# EAGLE board nanoHC06Rx (EAGLE 9.6.1)
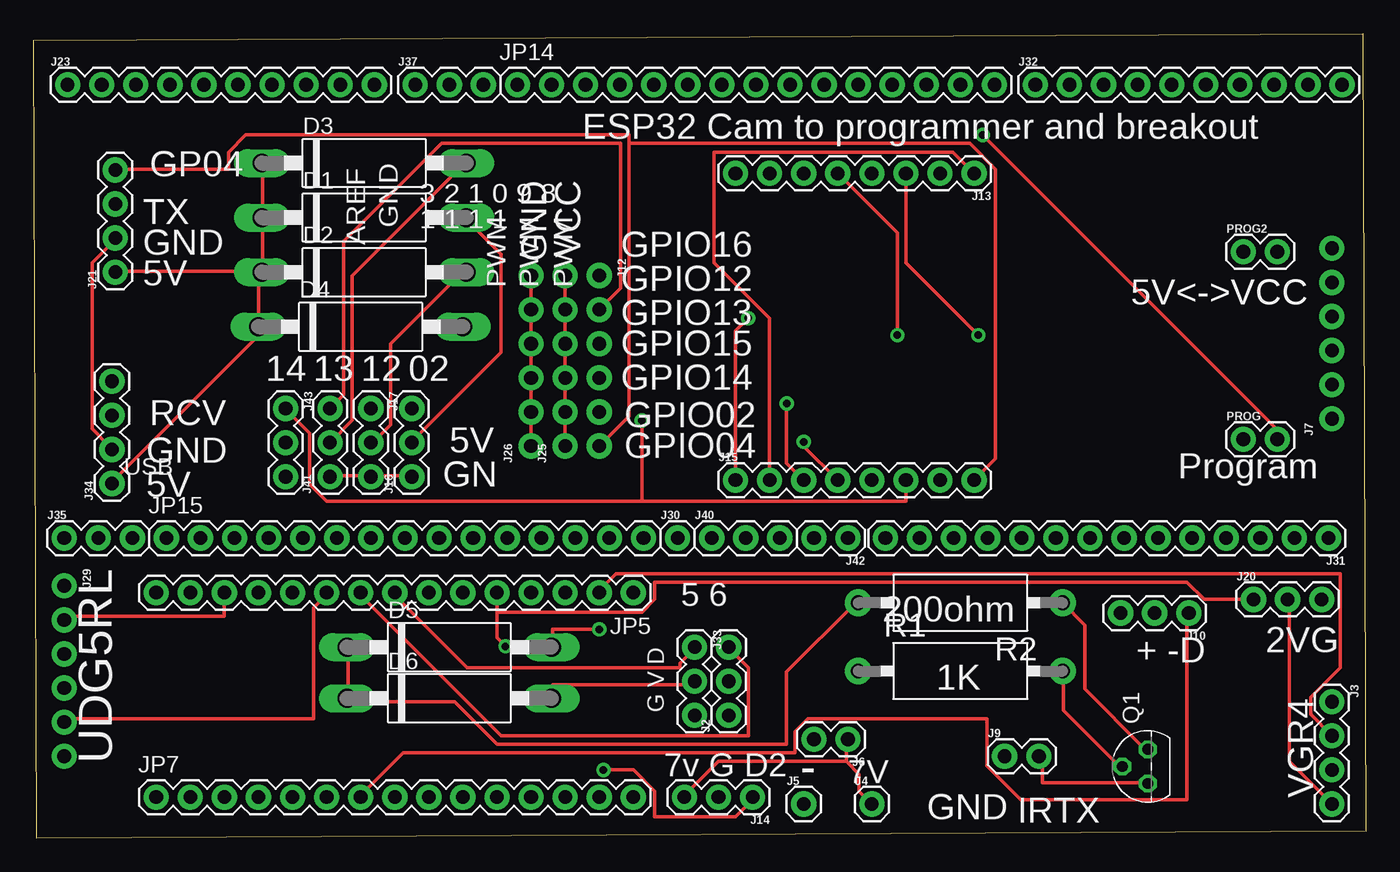
[diagram p0: board, top side]
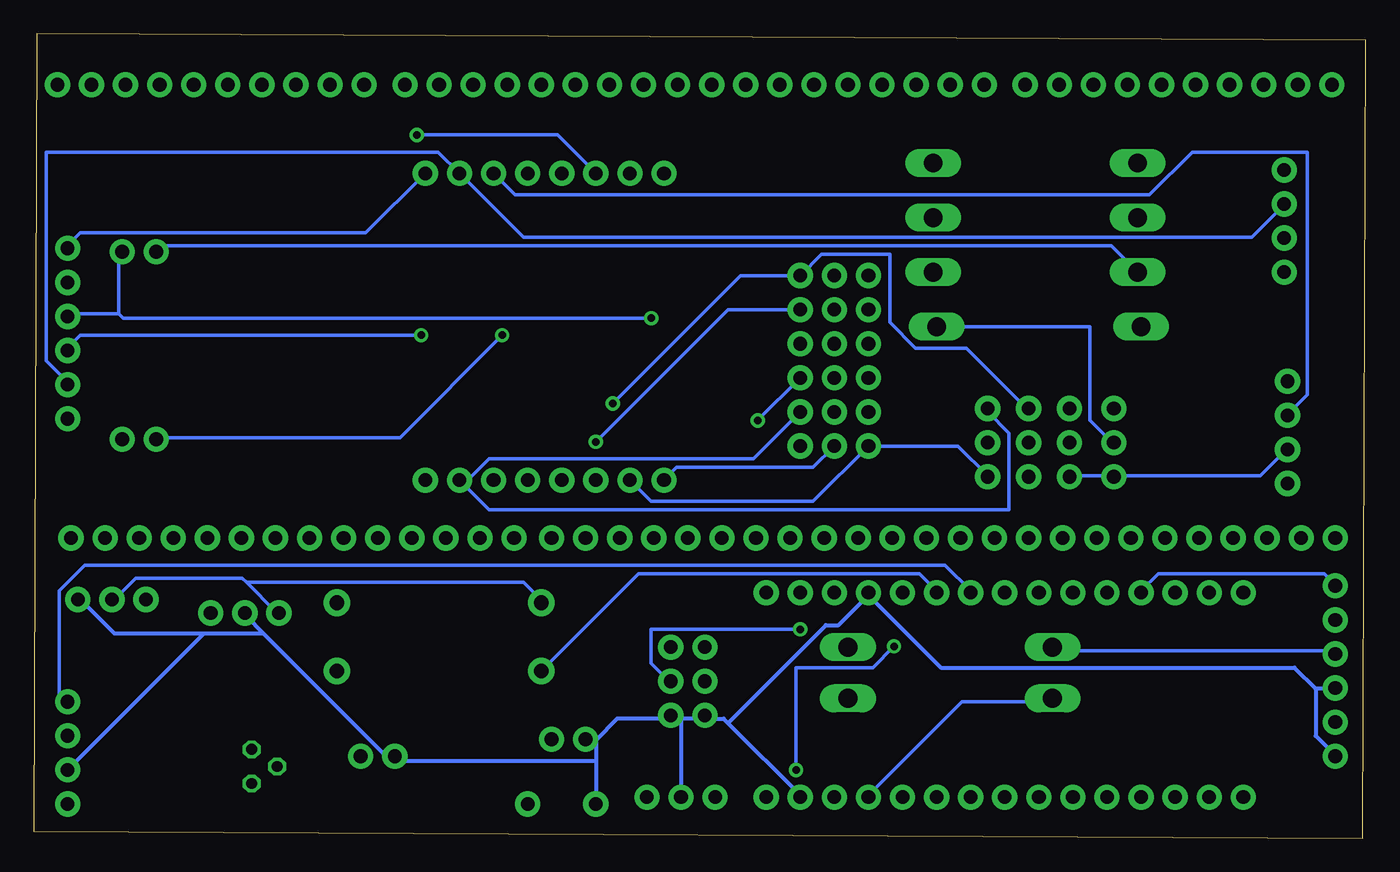
[diagram p1: board, bottom side, seen from below]

Size 99.31 x 59.94 mm. Coordinates in mm from the lower left corner, seen from the top.
Outline: 0,59.44 99.06,59.94 99.31,0.51 0.25,0 0,59.44
Copper layers (1*16): Top 0.035mm / dielectric 1.5mm / Bottom 0.035mm
Design rules "default": minimum track width 10mil, minimum drill 22mil, track to track 10mil, track to pad 10mil, pad to pad 10mil, via to via 16mil, smd to smd 8mil, copper to edge 30mil, drill to drill 12mil, minimum pad ring 10mil, minimum via ring 10mil, stop-mask expansion 4mil, vias tented up to drill 0mil, thermal gap 10mil
Net classes: 0 default: width 0.254 mm, clearance 0.254 mm; 1 power: width 0.61 mm, drill 0.711 mm, clearance 0.33 mm; 2 gnd: width 0.305 mm, drill 0.711 mm, clearance 0.254 mm; 3 usbvcc: width 0.508 mm, drill 0.711 mm, clearance 0.254 mm; 4 aref: width 0.406 mm
vRestrict: area 25.7,45.5 to 27.3,49.1; area 33.7,41 to 35.2,44.6; area 36.2,41 to 37.7,44.6; area 38.7,41 to 40.3,44.6; area 42.8,38.6 to 43.3,38.9

## Footprints (pad centres in the part's own frame; a part is rotated, then mirrored left to right if it is on the bottom)
C1702-15 = drill 1.397 long: A 7.62,0; C -7.62,0
1X03 = drill 1.016 pad 1.88: 1 0,0; 2 2.54,0; 3 5.08,0
1X04 = drill 1.016 pad 1.88: 1 0,0; 2 2.54,0; 3 5.08,0; 4 7.62,0
1X01 = drill 1.016 pad 1.88: 1 0,0
1X02 = drill 1.016 pad 1.88: 1 0,0; 2 2.54,0
1X06_NO_SILK = drill 1.016 pad 1.88: 1 0,0; 2 2.54,0; 3 5.08,0; 4 7.62,0; 5 10.16,0; 6 12.7,0
1X08 = drill 1.016 pad 1.88: 1 0,0; 2 2.54,0; 3 5.08,0; 4 7.62,0; 5 10.16,0; 6 12.7,0; 7 15.24,0; 8 17.78,0
1X10 = drill 1.016 pad 1.88: 1 0,0; 2 2.54,0; 3 5.08,0; 4 7.62,0; 5 10.16,0; 6 12.7,0; 7 15.24,0; 8 17.78,0; 9 20.32,0; 10 22.86,0
1X14 = drill 1.016 pad 1.88: 1 0,0; 2 2.54,0; 3 5.08,0; 4 7.62,0; 5 10.16,0; 6 12.7,0; 7 15.24,0; 8 17.78,0; 9 20.32,0; 10 22.86,0; 11 25.4,0; 12 27.94,0; 13 30.48,0; 14 33.02,0
1X15@1 = drill 1.016 pad 1.88: 1 0,0; 2 2.54,0; 3 5.08,0; 4 7.62,0; 5 10.16,0; 6 12.7,0; 7 15.24,0; 8 17.78,0; 9 20.32,0; 10 22.86,0; 11 25.4,0; 12 27.94,0; 13 30.48,0; 14 33.02,0; 15 35.56,0
TO92 = drill 0.813 octagon: 1 1.27,0; 2 0,1.905; 3 -1.27,0
CA0001 = drill 1.1 pad 2: 1 -7.62,0; 2 7.62,0

## Placement (x,y rotation side)
D1  1N5333  [C1702-15]  24.64,46.23 0 top
D2  1N5333  [C1702-15]  24.64,42.16 0 top
D3  1N5333  [C1702-15]  24.64,50.29 0 top
D4  1N5333  [C1702-15]  24.38,38.1 0 top
D5  1N5333  [C1702-15]  30.99,14.22 0 top
D6  1N5333  [C1702-15]  30.99,10.41 0 top
J2  Relay  [1X03]  51.82,9.14 90 top
J3  [1X04]  96.77,10.16 270 top
J4  [1X01]  62.48,2.54 0 top
J5  [1X01]  57.4,2.54 0 top
J6  [1X02]  60.71,7.37 180 top
J7  [1X06_NO_SILK]  96.77,31.24 90 top
J9  [1X02]  72.39,6.1 0 top
J10  Relay  [1X03]  86.11,16.76 180 top
J12  [1X06_NO_SILK]  42.16,41.91 270 top
J13  [1X08]  70.1,49.53 180 top
J14  Relay  [1X03]  53.59,3.05 180 top
J15  [1X08]  52.32,26.67 0 top
J16  Relay  [1X03]  28.19,26.92 90 top
J17  Relay  [1X03]  25.15,32 270 top
J20  Relay  [1X03]  90.93,17.78 0 top
J21  [1X04]  6.1,42.16 90 top
J23  [1X10]  2.54,56.13 0 top
J25  [1X06_NO_SILK]  39.62,29.21 90 top
J26  [1X06_NO_SILK]  37.08,29.21 90 top
J29  [1X06_NO_SILK]  2.29,18.8 270 top
J30  [1X01]  48.01,22.35 0 top
J31  [1X14]  96.52,22.35 180 top
J32  [1X10]  74.68,56.13 0 top
J33  Relay  [1X03]  49.28,14.22 270 top
J34  [1X04]  5.84,26.42 90 top
J35  [1X03]  2.29,22.35 0 top
J37  [1X03]  28.45,56.13 0 top
J40  [1X03]  50.55,22.35 0 top
J41  Relay  [1X03]  22.1,26.92 90 top
J42  [1X02]  60.71,22.35 180 top
J43  Relay  [1X03]  18.8,32 270 top
JP5  [1X15@1]  44.7,18.29 180 top
JP7  [1X15@1]  9.14,3.05 0 top
JP14  [1X15@1]  36.07,56.13 0 top
JP15  [1X15@1]  9.91,22.35 0 top
PROG  [1X02]  90.17,29.72 0 top
PROG2  [1X02]  90.17,43.69 0 top
Q1  2N5088  [TO92]  83.06,5.33 90 top
R1  1K  [CA0001]  69.09,12.45 0 top
R2  1K  [CA0001]  69.09,17.53 180 top

## Library data of the parts
D1-D6 = diode
J2 J10 J14 J16 J17 J20 J33 J41 J43 = SparkFun-Connectors; PROD_ID: XXX-00000
J3 J21 J34 = SparkFun-Connectors; PROD_ID: CONN-09696
J4-J6 J9 J30 J31 J35 J37 J40 J42 JP5 JP7 JP14 JP15 PROG PROG2 = SparkFun-Connectors
J7 J12 J25 J26 J29 = SparkFun-Connectors; PROD_ID: CONN-08437
J13 J15 = SparkFun-Connectors; PROD_ID: CONN-08438
J23 J32 = SparkFun-Connectors; PROD_ID: CONN-11563
Q1 = transistor-npn
R1 R2 = resistor-power; OC_FARNELL: unknown; OC_NEWARK: unknown

## Nets
3.3V_B: J13.8
5V_B: D1.C D2.C D3.C D4.C J21.1 J34.1 PROG2.1
7.4V: J4.1 J6.1 J14.3
D0: J3.2 JP5.2
D1: JP5.1
D2: J14.1 J20.1 JP5.5
D3: JP5.6 R1.1
D4: J3.1 JP5.7
D5: J33.1 JP5.8
D6: J2.3 JP5.9
D7: J29.5 JP5.10
D8: JP5.11
D9: J29.1 JP5.12
D10: J29.2 JP5.13
D11: JP5.14
D12: JP5.15
D13: JP7.1
D14: JP7.4
D15: JP7.5
D16: JP7.6
D17: J10.1 JP7.7
D18: JP7.8
D19: JP7.9
D20: JP7.10
D21: JP7.11
GND [gnd]: J2.1 J3.3 J5.1 J6.2 J9.1 J10.2 J14.2 J20.3 J29.4 J29.6 J33.3 JP5.4 JP7.14
GND_B: J7.6 J13.1 J15.2 J16.1 J17.3 J21.2 J26.1 J26.2 J26.3 J26.4 J26.5 J26.6 J34.2 J41.1 J43.3
GPIO02_B: J12.5 J15.7 J16.3
GPIO04_B: J12.6 J15.8 J21.4
GPIO12_B: J12.1 J15.3 J17.1
GPIO13_B: J12.2 J15.4 J41.3
GPIO14_B: J12.4 J15.6 J43.1
GPIO15_B: J15.5
GPIO16_B: J13.7
IRTX: J9.2 Q1.3
N$1: Q1.2 R1.2
N$2: D1.A J16.2
N$3: Q1.1 R2.1
N$4: D2.A J17.2
N$5: D3.A J41.2
N$6: D4.A J43.2
N$7: D5.A J2.2
N$8: D6.A J33.2
PROG1: J13.5 PROG.1
PROG2: J13.6 PROG.2
UOR: J7.3 J13.3 J34.3
UOT: J7.2 J13.2 J21.3
VCC: D5.C D6.C J3.4 J10.3 J20.2 J29.3 JP7.12 R2.2
VCC_B: J7.4 J15.1 J25.1 J25.2 J25.3 J25.4 J25.5 J25.6 PROG2.2

## Tracks (layer width: path | path; a pad name or v marks a point on that pad's centre or on a via)
5V_B
  Top 0.254: J34.1 5.97,26.67 16.76,37.47 D4.C 16.76,41.91 D2.C | D3.C 17.08,50.16 17.08,46.35 D1.C 17.08,46.04 17.08,42.23 D2.C | J21.1 6.29,42.23 16.76,42.23 D2.C
  Bottom 0.254: D2.C 18.99,44.13 89.79,44.13 90.11,43.81 PROG2.1
7.4V
  Top 0.254: 60.58,5.71 51.05,5.71 48.51,3.17 J14.3 | 60.58,5.71 60.58,7.3 J6.1 | J4.1 61.53,3.49 61.53,4.76 60.58,5.71
D0
  Top 0.254: J3.2 95.19,9.21 95.19,10.48 97.41,12.7 97.41,19.68 43.43,19.68 42.16,18.41 JP5.2
D2  (via drill 0.56)
  Top 0.254: v42.48,5.08 44.7,5.08 46.29,3.49 46.29,1.59 52.32,1.59 53.59,2.86 J14.1 | v35.18,14.29 34.54,14.92 34.54,16.83 | JP5.5 34.54,16.83 | J20.1 87.25,17.78 85.98,19.05 46.29,19.05 46.29,17.78 45.34,16.83 34.54,16.83
  Bottom 0.254: v42.48,5.08 42.48,12.7 36.77,12.7 v35.18,14.29
D3
  Bottom 0.254: R1.1 54.23,19.68 33.27,19.68 32,18.41 JP5.6
D4
  Bottom 0.254: J3.1 97.41,10.16 97.41,18.41 95.5,20.32 31.37,20.32 29.46,18.41 JP5.7
D5
  Top 0.254: JP5.8 26.92,18.1 32.32,12.7 48.2,12.7 48.2,13.02 49.15,13.97 J33.1
D6
  Top 0.254: JP5.9 24.38,18.1 34.86,7.62 53.28,7.62 53.28,12.7 52.01,13.97 J2.3
D7
  Top 0.254: J29.5 2.48,8.89 20.89,8.89 20.89,17.14 21.84,18.1 JP5.10
D9
  Bottom 0.254: J29.1 2.48,19.05 3.11,19.68 15.49,19.68 16.76,18.41 JP5.12
D10
  Top 0.254: JP5.13 14.22,16.51 2.48,16.51 J29.2
D17
  Top 0.254: JP7.7 24.38,3.17 27.56,6.35 56.77,6.35 56.77,7.94 57.72,8.89 71.06,8.89 71.06,5.4 73.6,2.86 85.98,2.86 85.98,16.51 J10.1
GND
  Bottom 0.305: 57.4,7.3 57.4,5.71 | 57.4,5.71 J5.1 | 57.4,7.3 58.04,7.3 J6.2 57.4,7.3 | 57.4,5.71 72.01,5.71 J9.1 72.64,6.35 73.28,6.35 82.17,15.24 | 82.17,15.24 83.44,16.51 J10.2 | 82.17,15.24 86.61,15.24 | 86.61,15.24 93.28,15.24 95.82,17.78 J20.3 | 86.61,15.24 J3.3 | 51.05,8.89 J14.2 | 51.05,8.89 51.69,8.89 J2.1 | 3.75,11.11 3.75,7.62 2.48,6.35 J29.6 | 3.75,11.11 2.48,11.11 J29.4 | 47.56,8.57 47.88,8.89 49.15,8.89 J33.3 49.47,8.89 51.05,8.89 | 47.56,8.57 42.16,3.17 JP7.14 | 37.08,18.1 39.31,15.88 40.26,15.88 47.56,8.57 | 3.75,11.11 5.33,12.7 31.69,12.7 37.08,18.1 | 37.08,18.1 JP5.4 | 51.05,8.89 J2.1 | 57.4,7.3 55.82,8.89 52.01,8.89 J2.1
GND_B
  Top 0.254: J16.1 28.19,26.99 25.34,26.99 J17.3 25.02,26.99 22.16,26.99 J41.1 | J21.2 5.97,44.45 4.38,42.86 4.38,30.48 5.65,29.21 J34.2 | J26.6 J26.5 J26.4 J26.3 J26.2 J26.1 | J13.1 68.52,51.12 50.74,51.12 50.74,42.86 54.86,38.73 J15.2
  Bottom 0.254: J41.1 21.84,26.99 18.99,26.99 J43.3 18.67,26.99 7.87,26.99 5.97,28.89 J34.2 | J13.1 74.55,45.09 95.82,45.09 96.77,44.13 J7.6 | J15.2 53.28,25.08 41.21,25.08 J26.1 30.42,29.21 28.19,26.99 J16.1
GPIO02_B
  Bottom 0.254: 67.25,26.35 65.34,24.45 26.61,24.45 26.61,30.16 28.19,31.75 J16.3 | J12.5 45.66,28.26 65.34,28.26 67.25,26.35 | 67.25,26.35 J15.7
GPIO04_B
  Top 0.254: 44.39,51.75 44.39,31.43 J12.6 | 44.39,51.75 44.39,52.39 15.81,52.39 14.54,51.12 14.54,49.85 6.29,49.85 J21.4 | J15.8 71.69,28.26 71.69,49.85 69.79,51.75 44.39,51.75
GPIO12_B  (via drill 0.56)
  Top 0.254: J15.3 56.13,27.94 v56.13,32.38
  Bottom 0.254: J17.1 25.34,32.07 29.78,36.51 33.59,36.51 35.5,38.42 35.5,43.5 40.58,43.5 J12.1 46.61,41.91 v56.13,32.38
GPIO13_B  (via drill 0.56)
  Top 0.254: J41.3 23.11,33.02 23.11,44.45 30.42,51.75 43.75,51.75 43.75,40.96 J12.2 | J15.4 57.4,29.21 v57.4,29.53
  Bottom 0.254: v57.4,29.53 47.56,39.37 J12.2
GPIO14_B  (via drill 0.56)
  Top 0.254: 45.34,25.08 65.02,25.08 J15.6 | 45.34,25.08 21.84,25.08 20.57,26.35 20.57,30.16 18.99,31.75 J43.1 | 45.34,25.08 v45.34,31.11
  Bottom 0.254: v45.34,31.11 J12.4
IRTX
  Top 0.254: Q1.3 82.8,4.13 75.18,4.13 75.18,6.03 J9.2
N$1
  Top 0.254: Q1.2 80.9,5.4 76.77,9.53 76.77,12.38 R1.2
N$2
  Top 0.254: J16.2 28.19,29.53 34.86,36.2 34.86,43.5 32.32,46.04 D1.A
N$3
  Top 0.254: R2.1 78.36,15.88 78.36,11.11 82.8,6.67 Q1.1
N$4
  Top 0.254: J17.2 25.34,29.53 26.61,30.8 26.61,36.83 32,42.23 D2.A
N$5
  Top 0.254: J41.2 23.75,31.11 23.75,41.91 32,50.16 D3.A
N$6
  Bottom 0.254: D4.A 20.57,38.1 20.57,31.11 18.99,29.53 J43.2
N$7  (via drill 0.56)
  Top 0.254: v42.16,15.56 38.67,15.56 38.67,14.29 D5.A
  Bottom 0.254: v42.16,15.56 53.28,15.56 53.28,13.02 52.01,11.75 J2.2
N$8
  Top 0.254: J33.2 49.15,11.43 38.67,11.43 38.67,10.48 D6.A
PROG1  (via drill 0.56)
  Top 0.254: J13.5 64.39,45.09 v64.39,37.47
  Bottom 0.254: v64.39,37.47 72.01,29.84 90.11,29.84 PROG.1
PROG2  (via drill 0.56)
  Top 0.254: v70.74,52.39 92.65,30.48 92.65,29.84 PROG.2
  Bottom 0.254: J13.6 60.26,52.39 v70.74,52.39
UOR  (via drill 0.56)
  Top 0.254: v70.42,37.47 65.02,42.86 J13.3
  Bottom 0.254: J13.3 63.44,47.94 16.13,47.94 12.95,51.12 4.38,51.12 4.38,33.02 5.65,31.75 J34.3 | v70.42,37.47 95.82,37.47 96.77,36.51 J7.3
UOT
  Bottom 0.254: J21.3 6.29,46.99 8.51,44.77 62.8,44.77 J13.2 69.15,51.12 98.36,51.12 98.36,35.56 96.77,33.97 J7.2
VCC
  Top 0.254: D5.C 23.43,13.97 23.43,10.48 D6.C 23.43,10.16 31.37,10.16 34.54,6.99 56.13,6.99 56.13,12.38 61.21,17.46 R2.2 | J3.4 93.6,5.71 93.6,17.78 J20.2
  Bottom 0.254: JP7.12 37.08,3.17 30.1,10.16 23.43,10.16 D6.C | J29.3 2.48,13.97 23.11,13.97 D5.C | 83.44,19.05 83.76,19.37 91.69,19.37 93.28,17.78 J20.2 | 83.44,19.05 81.22,16.83 J10.3 | 83.44,19.05 62.8,19.05 61.53,17.78 R2.2
VCC_B  (via drill 0.56)
  Top 0.254: J25.6 J25.5 J25.4 J25.3 J25.2 J25.1 | v53.28,38.73 52.32,37.78 J15.1
  Bottom 0.254: 92.96,39.05 92.96,43.5 PROG2.2 | 92.96,39.05 96.77,39.05 J7.4 | J15.1 51.37,27.62 41.21,27.62 J25.1 | 92.96,39.05 92.65,38.73 v53.28,38.73

## Text on the board
tNames: 3 2 1 0 9 8 | GND | 1 1 1 1 | AREF | PWM | PWM | PWM | USB
Reference: C8 | C2 | R11 | C4 | C5
_tsilk: ESP32 Cam to programmer and breakout | GP04 | GND | VCC | TX | GPIO16 | GND | GPIO12 | 5V<->VCC | 5V | GPIO13 | GPIO15 | GPIO14 | 14 | 13 | 12 | 02 | GPIO02 | RCV | GPIO04 | 5V | Program | GND | GN | 5V | 200ohm | 5 6 | 2VG | + -D | G V D | 1K | VGR4 | UDG5RL | 7v G D2 | - | 7V | GND | IRTX